# Altium PCB Main Controller.PcbDoc
Units mm, origin at the board's own origin, x right, y up, seen from the top; angles counter-clockwise.
Board outline 100 x 150 mm, 2 copper layers (Top Layer, Bottom Layer); 20 components, 28 nets, 235 pads, 11 vias.
Unrouted connection lines stored in the file: 1.
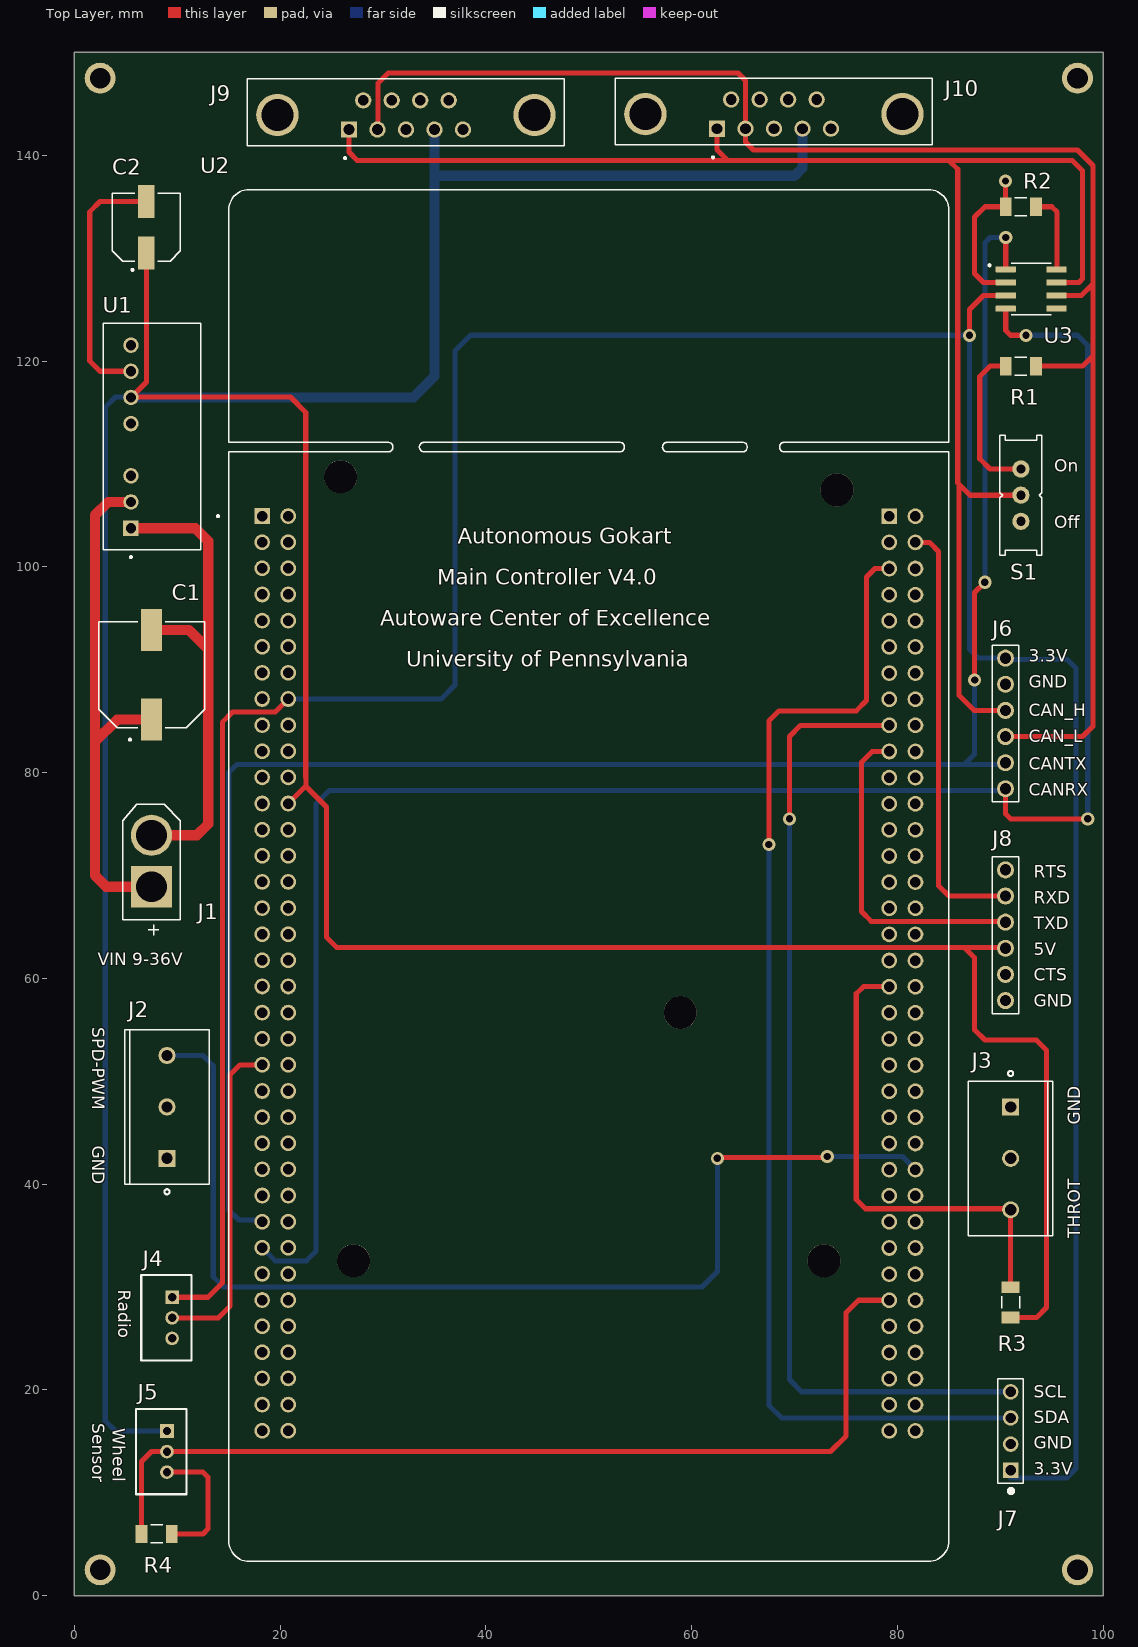
[diagram p0: Top Layer view]
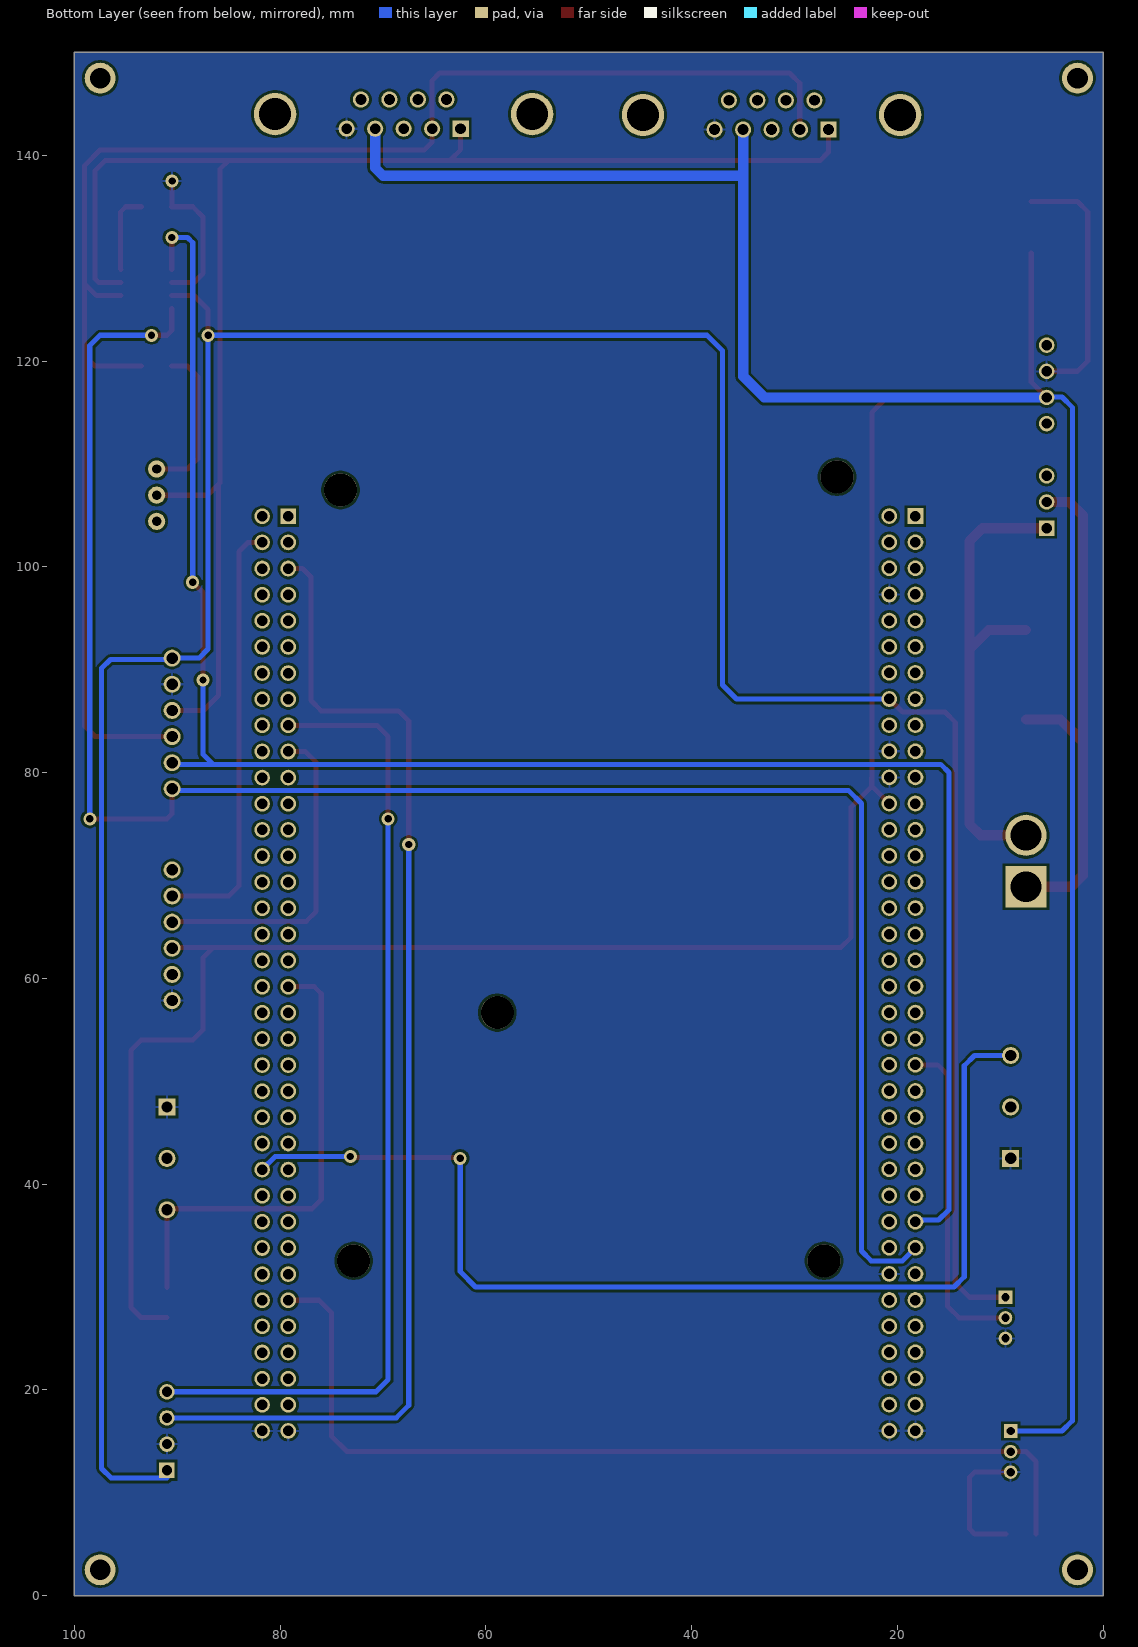
[diagram p1: Bottom Layer view, seen from below]

## Layer stack, top to bottom
Top Solder: solder mask 0.0102, Solder Resist, Dk 3.5
Top Layer: signal copper 0.0356
Dielectric 1: dielectric 0.32, FR-4, Dk 4.8
Bottom Layer: signal copper 0.0356
Bottom Solder: solder mask 0.0102, Solder Resist, Dk 3.5

## Board outline
0,0 0,150 100,150 100,0

## Design rules (kind name [scope] priority, off if disabled: settings)
Clearance [All] p1: gap=0.254 ignorepadtopadclearanceinfootprint=FALSE except(0: Arc-Hole Track-Hole SMDPad-Hole THPad-Hole Via-Hole Fill-Hole Poly-Hole Region-Hole Text-Hole)
HoleSize [All] p1: absolutevalues=TRUE maxlimit=5 minlimit=0.025 maxpercent=80.000 minpercent=20.000
PolygonConnect [All] p1: connectstyle=Relief reliefconductorwidth=0.254 reliefentries=4 polygonreliefangle="90 Angle" airgapwidth=0.254
RoutingVias [All] p1: holewidth=0.711 width=1.27 viastyle="Through Hole" minholewidth=0.711 minwidth=1.27 maxholewidth=0.711 maxwidth=1.27
SolderMaskExpansion [All] p1: expansion=0.102 istentingtop=FALSE
Width [All] p1: maxlimit=2 minlimit=0.254 preferedwidth=0.5 minimp=50.000000 maximp=50.000000 favimp=50.000000
29 further rules are at their usual default settings.

## Components (designator, comment, footprint, x,y, rotation, side; value= is the part's Value field where it differs from the comment)
C1 "EEETG1J470P" CAP_EEETG1J470P 7.5,89.5 r90 top
C2 "EEEFK1J220XP" CAP_EEEFK1J220XP 7,133 r90 top
J1 "XT30-M" AMASS_XT60-M 7.5,72.5 r90 top
J2 "282836-3" TE_282836-3 9,47.5 r90 top
J3 "282836-3" TE_282836-3 91,42.5 r270 top
J4 "Remote Control" B3B-PH-K 9.5,27 r270 top
J5 "Wheel Speed Sensor" B3B-PH-K 9,14 r270 top
J6 "61300611121" 61300611121 90.5,84.77 r90 top
J7 "826629-4" TE_826629-4 91,16 r90 top
J8 "61300611121" 61300611121 90.5,64.19 r90 top
J9 "D Sub-9" ASSMANN_A-DF_09_A_KG-T2S 32.23,143.92 r180 top
J10 "D Sub-9" ASSMANN_A-DF_09_A_KG-T2S 67.995,144 r180 top
R1 "120" RESC3216X65N 92,119.5 r0 top
R2 "10K" RESC3216X65N 92,135 r180 top
R3 "2.5K" RESC3216X65N 91,28.5 r270 top
R4 "66K" RESC3216X65N 8,6 r180 top
S1 "EG1218" EG1218 92,106.96 r90 top
U1 "PQQ10W-Q24-S5-S" CONV_PQQ10W-Q24-S5-S 7.55,112.65 r90 top
U2 "NUCLEO-F439ZI" Nucleo-F439ZI 50,70 r0 top
U3 "SN65HVD230QDR" SOIC127P599X175-8N 93,127 r0 top

## Footprints (in the part's own frame and the unit in brackets; to place one, negate y for a bottom-side part, rotate by r counter-clockwise, add the part's x,y. Pads: shape width x height; smd on the part's side, far side on the other; paste and mask are expansions set on the pad)
61300611121 [mm]
  round 1.65 hole 1.1: 1(-6.35,0) 2(-3.81,0) 3(-1.27,0) 4(1.27,0) 5(3.81,0) 6(6.35,0)
  silkscreen extent -7.62,-1.27 7.62,1.27
AMASS_XT60-M [mm]
  round 4 hole 3: N(1.4,0)
  rect 4x4 hole 3: P(-3.6,0)
  silkscreen extent -8.3,-2.8 4.4,2.8
ASSMANN_A-DF_09_A_KG-T2S [mm]
  rect 1.575x1.575 / inner round 1.575 / far side rect 1.575x1.575 hole 1.05: 1(5.54,1.42)
  round 1.575 hole 1.05: 2(2.77,1.42) 3(0,1.42) 4(-2.77,1.42) 5(-5.54,1.42) 6(4.155,-1.42) 7(1.385,-1.42) 8(-1.385,-1.42) 9(-4.155,-1.42)
  round 4.116 hole 3.1: S1(-12.495,0) S2(12.495,0)
  silkscreen extent -15.41,-3.5 15.41,4.3
B3B-PH-K [mil]
  rect 52x52 hole 32: 1(-78.74,0)
  round 52 hole 32: 2(0,0) 3(78.74,0)
  silkscreen extent -163,-118 163,75, body extent -156,-89 156,89, height 236
CAP_EEEFK1J220XP [mm]
  rect 3.2x1.6 smd: 1(-2.5,0) 2(2.5,0)
  silkscreen extent -4.25,-3.3 3.3,3.3, body extent -3.65,-3.3 3.65,3.3, height 7.7
CAP_EEETG1J470P [mm]
  rect 4.1x2 smd: 1(-4.35,0) 2(4.35,0)
  silkscreen extent -6.4,-5.15 5.15,5.15, body extent -5.85,-5.15 5.85,5.15, height 9.3
CONV_PQQ10W-Q24-S5-S [mm]
  rect 1.508x1.508 hole 1: 1(-8.89,2.05)
  round 1.508 hole 1: 2(-6.35,2.05) 3(-3.81,2.05) 5(1.27,2.05) 6(3.81,2.05) 7(6.35,2.05) 8(8.89,2.05)
  silkscreen extent -11.8,-4.75 11,4.75, body extent -11,-4.75 11,4.75
EG1218 [mil]
  round 66 hole 35.43: O(-100,0) P(0,0) S(100,0)
  silkscreen extent -230,-80 230,80
Nucleo-F439ZI [mm]
  rect 1.53x1.53 hole 1.02: CN11_1(-31.75,34.93) CN12_1(29.21,34.91)
  round 1.53 hole 1.02: CN11_2(-31.75,32.39) CN11_3(-31.75,29.85) CN11_4(-31.75,27.31) CN11_5(-31.75,24.77) CN11_6(-31.75,22.23) CN11_7(-31.75,19.69) CN11_8(-31.75,17.15) CN11_9(-31.75,14.61) CN11_10(-31.75,12.07) CN11_11(-31.75,9.53) CN11_12(-31.75,6.99) CN11_13(-31.75,4.45) CN11_14(-31.75,1.91) CN11_15(-31.75,-0.63) CN11_16(-31.75,-3.17) CN11_17(-31.75,-5.71) CN11_18(-31.75,-8.25) CN11_19(-31.75,-10.79) CN11_20(-31.75,-13.33) CN11_21(-31.75,-15.87) CN11_22(-31.75,-18.41) CN11_23(-31.75,-20.95) CN11_24(-31.75,-23.49) CN11_25(-31.75,-26.03) CN11_26(-31.75,-28.57) CN11_27(-31.75,-31.11) CN11_28(-31.75,-33.65) CN11_29(-31.75,-36.19) CN11_30(-31.75,-38.73) CN11_31(-31.75,-41.27) CN11_32(-31.75,-43.81) CN11_33(-31.75,-46.35) CN11_34(-31.75,-48.89) CN11_35(-31.75,-51.43) CN11_36(-31.75,-53.97) CN11_37(-29.21,34.93) CN11_38(-29.21,32.39) CN11_39(-29.21,29.85) CN11_40(-29.21,27.31) CN11_41(-29.21,24.77) CN11_42(-29.21,22.23) CN11_43(-29.21,19.69) CN11_44(-29.21,17.15) CN11_45(-29.21,14.61) CN11_46(-29.21,12.07) CN11_47(-29.21,9.53) CN11_48(-29.21,6.99) CN11_49(-29.21,4.45) CN11_50(-29.21,1.91) CN11_51(-29.21,-0.63) CN11_52(-29.21,-3.17) CN11_53(-29.21,-5.71) CN11_54(-29.21,-8.25) CN11_55(-29.21,-10.79) CN11_56(-29.21,-13.33) CN11_57(-29.21,-15.87) CN11_58(-29.21,-18.41) CN11_59(-29.21,-20.95) CN11_60(-29.21,-23.49) CN11_61(-29.21,-26.03) CN11_62(-29.21,-28.57) CN11_63(-29.21,-31.11) CN11_64(-29.21,-33.65) CN11_65(-29.21,-36.19) CN11_66(-29.21,-38.73) CN11_67(-29.21,-41.27) CN11_68(-29.21,-43.81) CN11_69(-29.21,-46.35) CN11_70(-29.21,-48.89) CN11_71(-29.21,-51.43) CN11_72(-29.21,-53.97) CN12_2(29.21,32.37) CN12_3(29.21,29.83) CN12_4(29.21,27.29) CN12_5(29.21,24.75) CN12_6(29.21,22.21) CN12_7(29.21,19.67) CN12_8(29.21,17.13) CN12_9(29.21,14.59) CN12_10(29.21,12.05) CN12_11(29.21,9.51) CN12_12(29.21,6.97) CN12_13(29.21,4.43) CN12_14(29.21,1.89) CN12_15(29.21,-0.65) CN12_16(29.21,-3.19) CN12_17(29.21,-5.73) CN12_18(29.21,-8.27) CN12_19(29.21,-10.81) CN12_20(29.21,-13.35) CN12_21(29.21,-15.89) CN12_22(29.21,-18.43) CN12_23(29.21,-20.97) CN12_24(29.21,-23.51) CN12_25(29.21,-26.05) CN12_26(29.21,-28.59) CN12_27(29.21,-31.13) CN12_28(29.21,-33.67) CN12_29(29.21,-36.21) CN12_30(29.21,-38.75) CN12_31(29.21,-41.29) CN12_32(29.21,-43.83) CN12_33(29.21,-46.37) CN12_34(29.21,-48.91) CN12_35(29.21,-51.45) CN12_36(29.21,-53.99) CN12_37(31.75,34.91) CN12_38(31.75,32.37) CN12_39(31.75,29.83) CN12_40(31.75,27.29) CN12_41(31.75,24.75) CN12_42(31.75,22.21) CN12_43(31.75,19.67) CN12_44(31.75,17.13) CN12_45(31.75,14.59) CN12_46(31.75,12.05) CN12_47(31.75,9.51) CN12_48(31.75,6.97) CN12_49(31.75,4.43) CN12_50(31.75,1.89) CN12_51(31.75,-0.65) CN12_52(31.75,-3.19) CN12_53(31.75,-5.73) CN12_54(31.75,-8.27) CN12_55(31.75,-10.81) CN12_56(31.75,-13.35) CN12_57(31.75,-15.89) CN12_58(31.75,-18.43) CN12_59(31.75,-20.97) CN12_60(31.75,-23.51) CN12_61(31.75,-26.05) CN12_62(31.75,-28.59) CN12_63(31.75,-31.13) CN12_64(31.75,-33.67) CN12_65(31.75,-36.21) CN12_66(31.75,-38.75) CN12_67(31.75,-41.29) CN12_68(31.75,-43.83) CN12_69(31.75,-46.37) CN12_70(31.75,-48.91) CN12_71(31.75,-51.45) CN12_72(31.75,-53.99)
  round 3.2 hole 3.2 unplated: ""(-24.13,38.74) ""(-22.86,-37.46) ""(8.89,-13.33) ""(22.86,-37.46) ""(24.13,37.47)
  silkscreen extent -36.14,-66.67 35,66.67
RESC3216X65N [mm]
  rect 1.13x1.77 smd: 1(-1.47,0) 2(1.47,0)
  silkscreen extent -0.58,-0.88 0.58,0.88
SOIC127P599X175-8N [mm]
  rrect25% 1.97x0.6 smd: 1(-2.47,1.905) 2(-2.47,0.635) 3(-2.47,-0.635) 4(-2.47,-1.905) 5(2.47,-1.905) 6(2.47,-0.635) 7(2.47,0.635) 8(2.47,1.905)
  silkscreen extent -4.14,-2.52 1.95,2.52, body extent -3,-2.45 3,2.45, height 1.75
TE_282836-3 [mm]
  rect 1.65x1.65 hole 1.1: 1(-5,0)
  round 1.65 hole 1.1: 2(0,0) 3(5,0)
  silkscreen extent -8.5,-4.1 7.5,4.1
TE_826629-4 [mm]
  rect 1.508x1.508 hole 1: 1(-3.81,0)
  round 1.508 hole 1: 2(-1.27,0) 3(1.27,0) 4(3.81,0)
  silkscreen extent -6.03,-1.25 5.08,1.25

## Part data
C1: "Cap Aluminum 47uF 63V 20% (10 X 10.2mm) SMD 0.8 Ohm 150mA 2000 hr 125Â°C T/R", Package="RADIAL-2 Panasonic", Availability="In Stock", Check_prices=https://www.snapeda.com/parts/EEE-TG1J470P/Panasonic+Electronic+Components/view-part/?ref=eda, MF="Panasonic Electronic", MP=EEE-TG1J470P, Price=None, Purchase-URL=https://pricing.snapeda.com/search/part/EEE-TG1J470P/?ref=eda, SnapEDA_Link=https://www.snapeda.com/parts/EEE-TG1J470P/Panasonic+Electronic+Components/view-part/?ref=snap
C2: "22ÂµF 63V Aluminum Electrolytic Capacitors Radial, Can - SMD 2000 Hrs @ 105Â°C", Package="RADIAL-2 Panasonic", Availability="In Stock", Check_prices=https://www.snapeda.com/parts/EEE-FK1J220XP/Panasonic+Electronic+Components/view-part/?ref=eda, MF=Panasonic, MP=EEE-FK1J220XP, Price=None, Purchase-URL=https://pricing.snapeda.com/search/part/EEE-FK1J220XP/?ref=eda, SnapEDA_Link=https://www.snapeda.com/parts/EEE-FK1J220XP/Panasonic+Electronic+Components/view-part/?ref=snap
J1: "Plug; DC supply; XT60; male; PIN: 2; for cable; soldered; 30A; 500V", Package=Package, Availability="Not in stock", Check_prices=https://www.snapeda.com/parts/XT60-M/AMASS/view-part/?ref=eda, MF=AMASS, MP=XT60-M, Price=None, SnapEDA_Link=https://www.snapeda.com/parts/XT60-M/AMASS/view-part/?ref=snap
J2 J3: "TERM BLOCK 3POS SIDE ENTRY 5MM", Package=None, Availability=Unavailable, MP=282836-3, Price=None
J4 J5: library part B3B-PH-K, "Connector Header Through Hole 3 position 0.079 (2.00mm)", Package=None, Availability="No availability data", Check_prices=https://www.snapeda.com/parts/B3B-PH-K/JST/view-part/2895696/?ref=eda, MF=JST, MP=B3B-PH-K, Price=None, SnapEDA_Link=https://www.snapeda.com/parts/B3B-PH-K/JST/view-part/2895696/?ref=snap
J6 J8: "Connector Header Through Hole 6 position 0.100 (2.54mm)", Package=None, Availability="In Stock", Check_prices=https://www.snapeda.com/parts/61300611121/Wurth+Elektronik/view-part/?ref=eda, MF="WÃ¼rth Elektronik", MP=61300611121, Price=None, Purchase-URL=https://pricing.snapeda.com/search/part/61300611121/?ref=eda, SnapEDA_Link=https://www.snapeda.com/parts/61300611121/Wurth+Elektronik/view-part/?ref=snap
J7: "Conn Unshrouded Header HDR 4 POS 2.54mm Solder ST Thru-Hole Automotive Carton", Package=None, Availability=Unavailable, EU_RoHS_Compliance=Compliant, MF="TE Connectivity", MP=826629-4, Price=None, SnapEDA_Link=https://www.snapeda.com/parts/826629-4/TE%20Connectivity%20AMP%20Connectors/view-part/891255/?ref=snap, TE_purchase_URL=https://www.te.com/usa-en/product-826629-4.html?te_bu=Cor&te_type=disp&te_campaign=seda_glo_cor-seda-global-disp-prtnr-fy19-seda-model-bom-cta_sma-317_1&elqCampaignId=32493
J9 J10: library part A-DF_09_A_KG-T2S, "9 Position D-Sub Receptacle, Female Sockets Connector", Package=None, Availability="In Stock", Check_prices=https://www.snapeda.com/parts/A-DF%2009%20A/KG-T2S/Assmann+WSW+Components/view-part/?ref=eda, MF="Assmann WSW", MP="A-DF 09 A/KG-T2S", Price=None, Purchase-URL="https://pricing.snapeda.com/search/part/A-DF 09 A/KG-T2S/?ref=eda", SnapEDA_Link=https://www.snapeda.com/parts/A-DF%2009%20A/KG-T2S/Assmann+WSW+Components/view-part/?ref=snap
R1 R2 R3 R4: library part KTR18EZPF9530, Package=None, Availability=Unavailable, MP=KTR18EZPF9530, Price=None
S1: "<b>SLIDING SWITCH</b><p> 0.1\" spacing through hole, vertical SPDT slide switch <p>http://www.ladyada.net/library/pcb/eaglelibrary.html</p>", Package=None, Availability=Unavailable, MP=EG1218, Price=None
U1: "10 W, 4:1 Input Range, Single Regulated Output, SIP8, 1500 Vdc Isolation, Dc-Dc Converter", Package="SIP-8 CUI Inc.", Availability="In Stock", Check_prices=https://www.snapeda.com/parts/PQQ10W-Q24-S5-S/CUI/view-part/?ref=eda, CUI_purchase_URL=https://www.cui.com/product/dc-dc-converters/isolated/pqq10w-s-series?utm_source=snapeda.com&utm_medium=referral&utm_campaign=snapedaBOM, MF="CUI Inc.", MP=PQQ10W-Q24-S5-S, Price=None, Purchase-URL=https://pricing.snapeda.com/search/part/PQQ10W-Q24-S5-S/?ref=eda, SnapEDA_Link=https://www.snapeda.com/parts/PQQ10W-Q24-S5-S/CUI/view-part/?ref=snap
U2: "STM32F429ZI, mbed-Enabled Development Nucleo-144 STM32F4 ARMÂ® CortexÂ®-M4 MCU 32-Bit Embedded Evaluation Board", Package=None, Availability=Unavailable, MP=NUCLEO-F429ZI, Price=None
U3: "3.3-V CAN Transceiver with Standby Mode 8-SOIC -40 to 125", Package="SOIC-8 Texas Instruments", Availability=Good, Check_prices=https://www.snapeda.com/parts/SN65HVD230QDR/Texas%20Instruments/view-part/1178075/?ref=eda, MF="Texas Instruments", MP=SN65HVD230QDR, Price=None, Purchase-URL=https://pricing.snapeda.com/search/part/SN65HVD230QDR/?ref=eda, SnapEDA_Link=https://www.snapeda.com/parts/SN65HVD230QDR/Texas%20Instruments/view-part/1178075/?ref=snap

## Free pads (board coordinates)
  round 3 hole 2: 6(2.5,2.5) 6(2.5,147.5) 6(97.5,2.5) 6(97.5,147.5)

## Via types
v1: diameter 1.27, hole 0.711, Top Layer to Bottom Layer, 11 vias

## Nets (pads, with @x,y where several pads share a name; then routed paths per layer and width w, separated by ;. In a path a pad name is that pad's centre, name@x,y a point inside that pad or via, vN(x,y) a via of type N, cw(c..) or ccw(c..) an arc to the next point about the centre after c; other vN are vias at no path point)
3.3V: J4.1 J6.6 J7.1 U2.CN11_44 U3.3 | length 299.9
  Top Layer w0.5: J4.1 13,29 14.382,30.382 14.382,84.882 15.379,85.879 19.519,85.879 U2.CN11_44 ; v1(87,122.5) 87,125 88.365,126.365 U3.3
  Bottom Layer w0.5: U2.CN11_44 35.65,87.15 37,88.5 37,121 38.5,122.5 v1(87,122.5) 87,92 87.88,91.12 J6.6 90.62,91 96.5,91 97.361,90.139 97.361,12.361 96.42,11.42 91,11.42
5V: C2.1 J5.1 J8.3 J9.4 J10.4 R3.2 U1.6 U2.CN11_48 | length 400.1
  Top Layer w0.5: U1.6@5.46,116.5 U1.6 U1.6@5.54,116.5 ; C2.1 7,117.96 U1.6@5.54,116.5 ; U2.CN11_48 22.45,78.65 ; 22.49,79.51 22.5,79.5 22.5,78.65 24.5,76.65 24.5,64 25.501,62.999 86.501,62.999 ; 22.49,79.56 22.49,115.01 21,116.5 U1.6@5.54,116.5 ; J8.3 90.421,62.999 86.501,62.999 ; R3.2 93.53,27.03 94.5,28 94.5,53 93.5,54 88.5,54 87.5,55 87.5,62 86.501,62.999
  Bottom Layer w0.5: U1.6 5.46,116.5 4,116.5 3,115.5 3,17 4,16 J5.1
  Bottom Layer w1: U1.6 32.96,116.46 35,118.5 35,138 ; J9.4 35,138 ; J10.4 70.765,138.765 70,138 35,138
CAN_HIGH: J6.4 J9.1 J10.1 S1.P U3.7 | length 154.9
  Top Layer w0.5: J9.1 26.69,140.31 27.5,139.5 63.5,139.5 ; J10.1 62.455,140.545 63.5,139.5 ; J6.4 87.46,86.04 86,87.5 86,108 ; S1.P 87.04,106.96 86,108 ; U3.7 97.635,127.635 98,128 98,138.5 97,139.5 85,139.5 ; 63.5,139.5 85,139.5 ; 85,139.5 85.861,138.639 85.861,108.139 86,108
CAN_LOW: J6.3 J9.2 J10.2 R1.2 U3.6 | length 155
  Top Layer w0.5: J9.2 29.5,142.54 29.5,147 30.5,148 64.5,148 65.225,147.275 J10.2 65.225,141.275 66,140.5 97.5,140.5 99,139 99,127.5 ; J6.3 98,83.5 99,84.5 99,120.5 ; R1.2 98,119.5 99,120.5 ; U3.6 97.865,126.365 99,127.5 ; 99,120.5 99,127.5
CAN_RX: J6.1 U2.CN11_29 U3.4 | length 184.6
  Top Layer w0.5: U3.4 90.53,122.97 91,122.5 v1(92.5,122.5) ; J6.1@90.54,78.46 J6.1 90.5,76 91,75.5 v1(98.5,75.5)
  Bottom Layer w0.5: U2.CN11_29 19.519,32.541 22.541,32.541 23.5,33.5 23.5,77 24.741,78.241 90.321,78.241 J6.1 ; v1(92.5,122.5) 97.5,122.5 98.5,121.5 v1(98.5,75.5)
CAN_TX: J6.2 U2.CN11_28 U3.1 | length 179
  Top Layer w0.5: v1(87.5,89) 87.5,97.5 v1(88.5,98.5) ; U3.1 v1(90.53,132)
  Bottom Layer w0.5: U2.CN11_28 18.1,36.5 16,36.5 15,37.5 15,80 15.799,80.799 53.838,80.799 53.856,80.781 86.5,80.781 ; v1(87.5,89) 87.5,81.781 86.5,80.781 ; v1(88.5,98.5) 88.5,131.5 89,132 v1(90.53,132) ; J6.2 90.321,80.781 86.5,80.781
CTS: J8.2
DEN: U2.CN12_28
DRDY: U2.CN12_24
GND: C2.2 J2.1 J3.1 J4.3 J5.3 J6.5 J7.2 J8.1 J9.5 J10.5 R2.2 R4.1 U1.7 U2.CN11_36 U2.CN11_40 U2.CN11_46 U2.CN11_47 U2.CN11_66 U2.CN11_72 U2.CN12_36 U2.CN12_72 U3.2 | length 52.6
  Top Layer w0.5: U1.7 2.5,119 1.5,120 1.5,134.5 2.5,135.5 C2.2 ; J5.3 12.5,12 13,11.5 13,6.5 12.5,6 R4.1 ; v1(90.5,137.5) 90.515,137.485 90.515,135.015 R2.2 88.5,135 87.5,134 87.5,128.5 88.365,127.635 U3.2
INT1: U2.CN12_26
INT2: U2.CN12_27
INTM: U2.CN12_25
NetR1_1: R1.1 S1.S | length 15.4
  Top Layer w0.5: R1.1 89,119.5 88,118.5 88,110.5 89,109.5 S1.S
NetR2_1: R2.1 U3.8 | length 7.8
  Top Layer w0.5: R2.1 95,135 95.5,134.5 95.5,128.935 U3.8
PB3: U2.CN12_16
PB4: U2.CN12_14
Radio: J4.2 U2.CN11_22 | length 32.1
  Top Layer w0.5: J4.2 14,27 15.136,28.136 15.136,50.636 16.09,51.59 U2.CN11_22
RTS: J8.6
RXD: J8.5 U2.CN12_38 | length 42
  Top Layer w0.5: U2.CN12_38 83.13,102.37 84,101.5 84,69 85,68 J8.5
SCL: J7.4 U2.CN12_9 | length 94.7
  Top Layer w0.5: v1(69.5,75.5) 69.5,83.5 70.59,84.59 U2.CN12_9
  Bottom Layer w0.5: v1(69.5,75.5) 69.5,21 70.681,19.819 90.991,19.819 J7.4
SDA: J7.3 U2.CN12_3 | length 115.4
  Top Layer w0.5: v1(67.5,73) 67.5,85 68.5,86 76,86 77,87 77,99 77.83,99.83 U2.CN12_3
  Bottom Layer w0.5: v1(67.5,73) 67.5,18.5 68.721,17.279 90.991,17.279 J7.3
"Speed PWM": J2.3 U2.CN12_62 | length 106.3
  Top Layer w0.5: v1(62.5,42.5) 62.589,42.589 73.089,42.589 v1(73.179,42.679)
  Bottom Layer w0.5: J2.3 12.5,52.5 13.5,51.5 13.5,31 14.5,30 61,30 62.5,31.5 v1(62.5,42.5) ; v1(73.179,42.679) 80.481,42.679 U2.CN12_62
Switch: J5.2 R4.2 U2.CN12_31 | length 93.2
  Top Layer w0.5: R4.2 6.53,13.03 7.5,14 J5.2 73.5,14 75,15.5 75,27.5 76.21,28.71 U2.CN12_31
Throttle: J3.3 R3.1 U2.CN12_19 | length 46.4
  Top Layer w0.5: U2.CN12_19 76.69,59.19 76,58.5 76,38.5 76.901,37.599 90.901,37.599 J3.3 R3.1
TXD: J8.4 U2.CN12_10 | length 32.1
  Top Layer w0.5: U2.CN12_10 77.55,82.05 76.5,81 76.5,66.5 77.461,65.539 90.421,65.539 J8.4
VIN_N: C1.2 J1.N U1.1 | length 47.7
  Top Layer w1: U1.1 11.74,103.76 13,102.5 13,92 ; J1.N 11.9,73.9 13,75 13,92 ; C1.2 11.15,93.85 13,92
VIN_P: C1.1 J1.P U1.2 | length 51.4
  Top Layer w1: U1.2 3.3,106.3 2,105 2,83 ; J1.P 3.1,68.9 2,70 2,83 ; C1.1 4.15,85.15 2,83
pads on no net: J2.2 J3.2 J9.3 J9.6 J9.7 J9.8 J9.9 J9.S1 J9.S2 J10.3 J10.6 J10.7 J10.8 J10.9 J10.S1 J10.S2 S1.O U1.3 U1.5 U1.8 U2. U2.CN11_1 U2.CN11_2 U2.CN11_3 U2.CN11_4 U2.CN11_5 U2.CN11_6 U2.CN11_7 U2.CN11_8 U2.CN11_9 U2.CN11_10 U2.CN11_11 U2.CN11_12 U2.CN11_13 U2.CN11_14 U2.CN11_15 U2.CN11_16 U2.CN11_17 U2.CN11_18 U2.CN11_19 U2.CN11_20 U2.CN11_21 U2.CN11_23 U2.CN11_24 U2.CN11_25 U2.CN11_26 U2.CN11_27 U2.CN11_30 U2.CN11_31 U2.CN11_32 U2.CN11_33 U2.CN11_34 U2.CN11_35 U2.CN11_37 U2.CN11_38 U2.CN11_39 U2.CN11_41 U2.CN11_42 U2.CN11_43 U2.CN11_45 U2.CN11_49 U2.CN11_50 U2.CN11_51 U2.CN11_52 U2.CN11_53 U2.CN11_54 U2.CN11_55 U2.CN11_56 U2.CN11_57 U2.CN11_58 U2.CN11_59 U2.CN11_60 U2.CN11_61 U2.CN11_62 U2.CN11_63 U2.CN11_64 U2.CN11_65 U2.CN11_67 U2.CN11_68 U2.CN11_69 U2.CN11_70 U2.CN11_71 U2.CN12_1 U2.CN12_2 U2.CN12_4 U2.CN12_5 U2.CN12_6 U2.CN12_7 U2.CN12_8 U2.CN12_11 U2.CN12_12 U2.CN12_13 U2.CN12_15 U2.CN12_17 U2.CN12_18 U2.CN12_20 U2.CN12_21 U2.CN12_22 U2.CN12_23 U2.CN12_29 U2.CN12_30 U2.CN12_32 U2.CN12_33 U2.CN12_34 U2.CN12_35 U2.CN12_37 U2.CN12_39 U2.CN12_40 U2.CN12_41 U2.CN12_42 U2.CN12_43 U2.CN12_44 U2.CN12_45 U2.CN12_46 U2.CN12_47 U2.CN12_48 U2.CN12_49 U2.CN12_50 U2.CN12_51 U2.CN12_52 U2.CN12_53 U2.CN12_54 U2.CN12_55 U2.CN12_56 U2.CN12_57 U2.CN12_58 U2.CN12_59 U2.CN12_60 U2.CN12_61 U2.CN12_63 U2.CN12_64 U2.CN12_65 U2.CN12_66 U2.CN12_67 U2.CN12_68 U2.CN12_69 U2.CN12_70 U2.CN12_71 U3.5

## Polygon pours and split planes (outlines as drawn)
GND on Bottom Layer "NONET_L02_P-001" (solid, pour order 0): 0,150 100,150 100,0 0,0

## Silkscreen, mask and mechanical layers (free items; w line width, h text height)
Top Overlay:
  text "On" at 95.254,109.254 h1.2
  text "Off" at 95.254,103.754 h1.2
  text "Autonomous Gokart" at 37.254,102.254 h1.52
  text "Main Controller V4.0" at 35.254,98.254 h1.52
  text "Autoware Center of Excellence" at 29.754,94.254 h1.52
  text "3.3V" at 92.754,90.754 h1.2
  text "University of Pennsylvania" at 32.254,90.262 h1.52
  text "GND" at 92.754,88.254 h1.2
  text "CAN_H" at 92.754,85.454 h1.2
  text "CAN_L" at 92.754,82.954 h1.2
  text "CANTX" at 92.754,80.254 h1.2
  text "CANRX" at 92.754,77.754 h1.2
  text "RTS" at 93.254,69.754 h1.2
  text "RXD" at 93.254,67.254 h1.2
  text "TXD" at 93.254,64.754 h1.2
  text "5V" at 93.254,62.254 h1.2
  text "VIN 9-36V" at 2.254,61.254 h1.2
  text "CTS" at 93.254,59.754 h1.2
  text "GND" at 93.254,57.254 h1.2
  text "SPD-PWM" at 1.754,55.246 h1.2 r270
  text "GND" at 97.746,45.754 h1.2 r90
  text "GND" at 1.754,43.746 h1.2 r270
  text "THROT" at 97.746,34.754 h1.2 r90
  text "Radio" at 4.254,29.746 h1.2 r270
  text "SCL" at 93.254,19.254 h1.2
  text "SDA" at 93.254,16.754 h1.2
  text "Sensor" at 1.754,16.746 h1.2 r270
  text "Wheel" at 3.754,16.246 h1.2 r270
  text "GND" at 93.254,14.254 h1.2
  text "3.3V" at 93.254,11.754 h1.2
Mechanical 1:
  the board outline again, w0.254